# EAGLE board HW2 (EAGLE 9.3.2)

Size 160 x 100 mm. Coordinates in mm from the lower left corner, seen from the top.
Outline: 0,0 160,0 160,100 0,100 0,0
Copper layers (1*16): Top 0.035mm / dielectric 1.5mm / Bottom 0.035mm
Design rules "default": minimum track width 6mil, minimum drill 0.35mm, track to track 6mil, track to pad 6mil, pad to pad 6mil, via to via 6mil, smd to smd 6mil, copper to edge 40mil, drill to drill 6mil, minimum pad ring 10mil, minimum via ring 8mil, stop-mask expansion 4mil, vias tented up to drill 0mil, thermal gap 10mil

## Footprints (pad centres in the part's own frame; a part is rotated, then mirrored left to right if it is on the bottom)
C025-025X050 = drill 0.813 octagon: 1 -1.27,0; 2 1.27,0
B45181B = drill 0.813: + -2.54,0 | drill 0.813 octagon: - 2.54,0
USB-MICROB = smd 1.4 x 0.35: D+ -2.65,0; D- -2.65,-0.65; GND -2.65,1.3; ID -2.65,0.65; VBUS -2.65,-1.3 | smd 1.9 x 1.8: MT1 0,-4; MT2 0,4 | smd 1.9 x 1.9: P$1 0,-1.27; P$2 0,1.27
LED3MM = drill 0.813 octagon: A -1.27,0; K 1.27,0
0207/10 = drill 0.813 octagon: 1 -5.08,0; 2 5.08,0
DIL28-3 = drill 0.813 long: 1 -16.51,-3.81; 2 -13.97,-3.81; 3 -11.43,-3.81; 4 -8.89,-3.81; 5 -6.35,-3.81; 6 -3.81,-3.81; 7 -1.27,-3.81; 8 1.27,-3.81; 9 3.81,-3.81; 10 6.35,-3.81; 11 8.89,-3.81; 12 11.43,-3.81; 13 13.97,-3.81; 14 16.51,-3.81; 15 16.51,3.81; 16 13.97,3.81; 17 11.43,3.81; 18 8.89,3.81; 19 6.35,3.81; 20 3.81,3.81; 21 1.27,3.81; 22 -1.27,3.81; 23 -3.81,3.81; 24 -6.35,3.81; 25 -8.89,3.81; 26 -11.43,3.81; 27 -13.97,3.81; 28 -16.51,3.81
SLIDE_SWITCH = drill 0.8: 1 -2,0; 2 0,0; 3 2,0 | drill 1: P$1 -4,0; P$2 4,0
TO92 = drill 0.813 octagon: 1 -1.27,0; 2 0,1.905; 3 1.27,0
PUSH_BUTTON = drill 1.016 pad 1.88: 1 -2.54,0; 2 2.54,0
1X08 = drill 1.016 pad 1.88: 1 0,0; 2 2.54,0; 3 5.08,0; 4 7.62,0; 5 10.16,0; 6 12.7,0; 7 15.24,0; 8 17.78,0
1X05 = drill 1.016 pad 1.88: 1 0,0; 2 2.54,0; 3 5.08,0; 4 7.62,0; 5 10.16,0
OSCILLATOR = drill 1.016 pad 1.88: 1 -2.54,0; 2 0,0; 3 2.54,0

## Placement (x,y rotation side)
C1  0.1 μF  [C025-025X050]  -30.48,24.13 0 top  (outside the outline)
C2  0.1 μF  [C025-025X050]  -36.83,24.13 0 top  (outside the outline)
C3  0.1 μF  [C025-025X050]  -43.18,24.13 0 top  (outside the outline)
C4  0.1 μF  [C025-025X050]  -49.53,24.13 0 top  (outside the outline)
C5  10 μF  [B45181B]  -53.34,15.24 0 top  (outside the outline)
C6  10 μF  [B45181B]  -22.86,22.86 0 top  (outside the outline)
J1  [USB-MICROB]  -16.51,5.08 0 top  (outside the outline)
LED1  Red  [LED3MM]  -30.48,53.34 0 top  (outside the outline)
LED2  Green  [LED3MM]  -20.32,53.34 0 top  (outside the outline)
R1  330 Ω  [0207/10]  -27.94,41.91 0 top  (outside the outline)
R2  330 Ω  [0207/10]  -40.64,41.91 0 top  (outside the outline)
R3  10 kΩ  [0207/10]  -53.34,41.91 0 top  (outside the outline)
R4  10 kΩ  [0207/10]  -19.05,46.99 0 top  (outside the outline)
U$1  PIC32MX250F128B  [DIL28-3]  -38.1,6.35 0 top  (outside the outline)
U$2  SLIDE_SWITCH  [SLIDE_SWITCH]  -38.1,15.24 0 top  (outside the outline)
U$3  VOLTAGE_REGULATOR_L4931  [TO92]  -55.88,48.26 0 top  (outside the outline)
U$4  RESET  [PUSH_BUTTON]  -34.29,30.48 0 top  (outside the outline)
U$5  USER  [PUSH_BUTTON]  -45.72,30.48 0 top  (outside the outline)
U$6  CONN_08  [1X08]  -31.75,38.1 0 top  (outside the outline)
U$7  CONN_08  [1X08]  -53.34,38.1 0 top  (outside the outline)
U$8  SNAP  [1X05]  -24.13,31.75 0 top  (outside the outline)
U$9  8 MHz  [OSCILLATOR]  -17.78,43.18 0 top  (outside the outline)

## Library data of the parts
C1-C6 = HW2; SPICEPREFIX: C
J1 = HW2; PROD_ID: CONN-09505; SF_ID: PRT-08533
LED1 LED2 U$1-U$9 = HW2
R1-R4 = HW2; SPICEPREFIX: R

## Nets
+3V3: C1.1 C2.1 C4.1 C6.+ LED1.A R3.2 U$1.13 U$1.23 U$1.28 U$3.1 U$7.2 U$8.2
+5V: C3.1 U$1.15 U$2.3 U$3.3 U$6.2
A0: U$1.2 U$7.8
A1: U$1.3 U$7.7
A4/LED: LED2.A U$1.12 U$7.3
B2: U$1.6 U$7.6
B3: U$1.7 U$7.5
B4/USER: R4.1 U$1.11 U$5.1 U$7.4
B7: U$1.16 U$6.3
B8: U$1.17 U$6.4
B9: U$1.18 U$6.5
B13: U$1.24 U$6.6
B14: U$1.25 U$6.7
B15: U$1.26 U$6.8
D+: J1.D+ U$1.21
D-: J1.D- U$1.22
GND: C1.2 C2.2 C3.2 C4.2 C5.- C6.- J1.GND R1.1 R2.1 U$1.8 U$1.19 U$1.27 U$3.2 U$4.2 U$5.2 U$6.1 U$7.1 U$8.3 U$9.2
MCLR: R3.1 U$1.1 U$4.1 U$8.1
N$1: J1.VBUS U$2.2
N$2: LED1.K R1.2
N$3: LED2.K R2.2
N$4: U$1.9 U$9.1
N$5: U$1.10 U$9.3
N$6: C5.+ U$1.20
PGC: U$1.5 U$8.5
PGD: U$1.4 U$8.4
USBID: J1.ID U$1.14

## Tracks (layer width: path | path; a pad name or v marks a point on that pad's centre or on a via)
+3V3  (11 unrouted)
+5V  (4 unrouted)
A0  (1 unrouted)
A1  (1 unrouted)
A4/LED  (2 unrouted)
B2  (1 unrouted)
B3  (1 unrouted)
B4/USER  (3 unrouted)
B7  (1 unrouted)
B8  (1 unrouted)
B9  (1 unrouted)
B13  (1 unrouted)
B14  (1 unrouted)
B15  (1 unrouted)
D+  (1 unrouted)
D-  (1 unrouted)
GND  (18 unrouted)
MCLR  (3 unrouted)
N$1  (1 unrouted)
N$2  (1 unrouted)
N$3  (1 unrouted)
N$4  (1 unrouted)
N$5  (1 unrouted)
N$6  (1 unrouted)
PGC  (1 unrouted)
PGD  (1 unrouted)
USBID  (1 unrouted)